# Altium PCB JDY-40.PcbDoc
Units mm, origin at the board's own origin, x right, y up, seen from the top; angles counter-clockwise.
Board outline 13.52 x 14.69 mm, 2 copper layers (TopLayer, BottomLayer); 1 components, 0 nets, 20 pads, 0 vias.
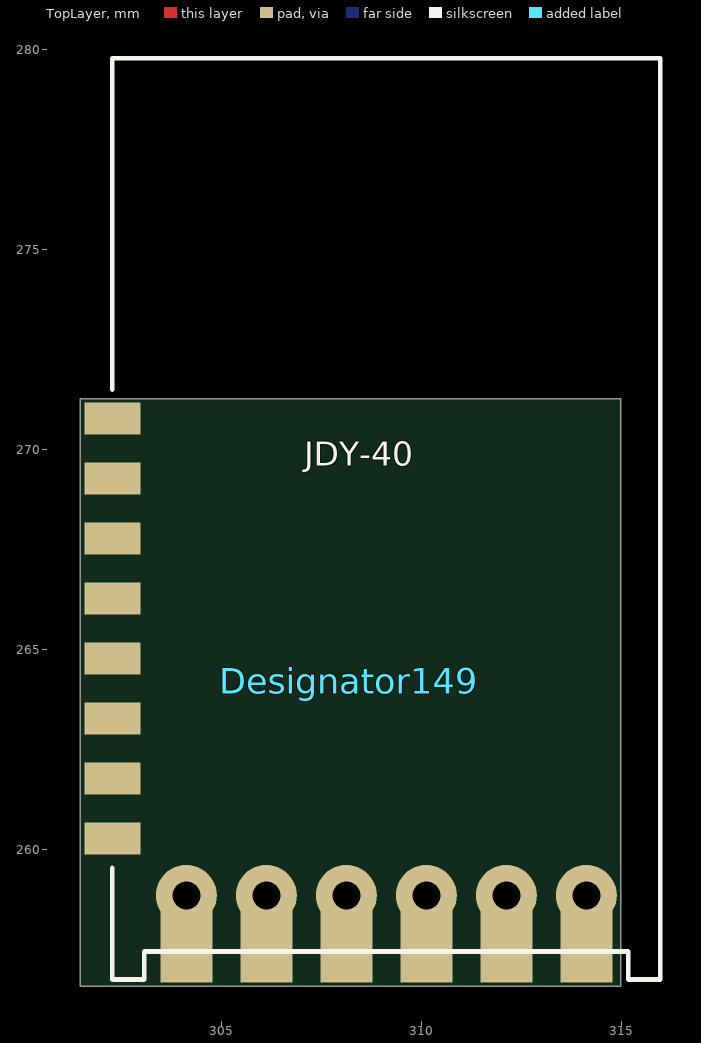
[diagram p0: TopLayer view]
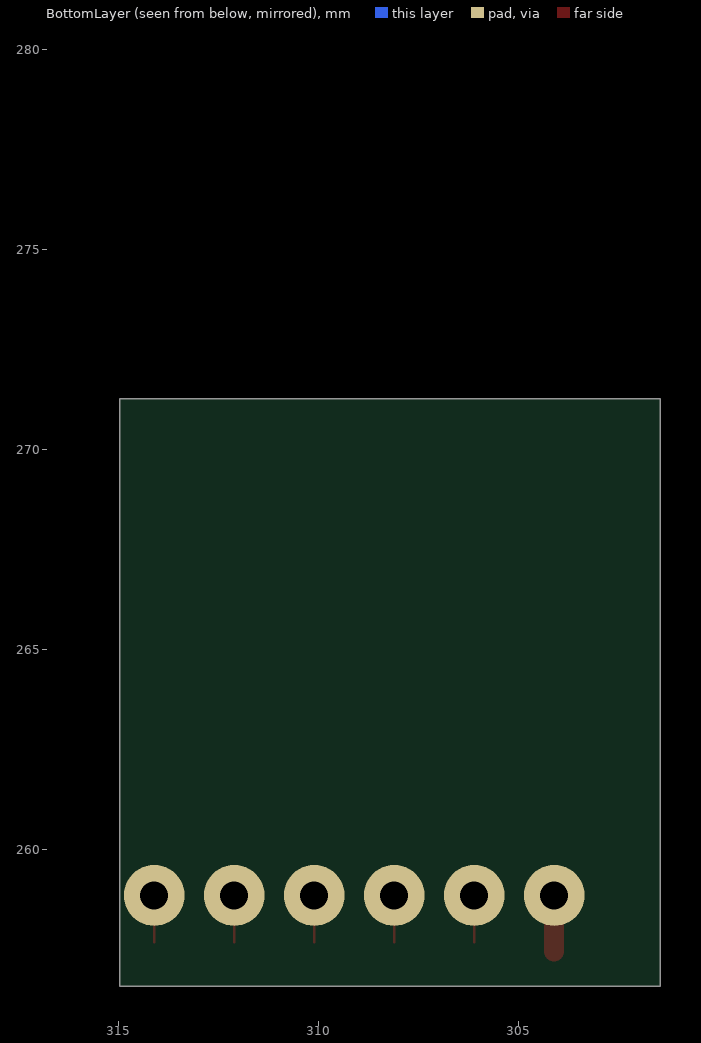
[diagram p1: BottomLayer view, seen from below]

## Layer stack, top to bottom
TopSolder: solder mask 0.0102, Solder Resist, Dk 3.5
TopLayer: signal copper 0.0356
Dielectric1: dielectric 0.32, FR-4, Dk 4.8
BottomLayer: signal copper 0.0356
BottomSolder: solder mask 0.0102, Solder Resist, Dk 3.5

## Board outline
301.458,256.571 314.974,256.571 314.974,271.266 301.458,271.266

## Design rules (kind name [scope] priority, off if disabled: settings)
Clearance [All] p1: gap=0.254 ignorepadtopadclearanceinfootprint=FALSE
FabricationTestPointUsage TestPointUsage [All] p1: valid=0 allowmultiple=FALSE
FabricationTestpoint Testpoint [All] p1: side=3 testpointundercomponent=TRUE minsize=1.016 maxsize=2.54 preferedsize=1.524 minholesize=0.508 maxholesize=1.016 preferedholesize=0.813 testpointgrid=0.025 allowsidetop=TRUE allowsidebottom=TRUE usegrid=TRUE gridtolerance=0
PolygonConnect [All] p1: connectstyle=Relief reliefconductorwidth=0.254 reliefentries=4 polygonreliefangle="90 Angle" airgapwidth=0.254
RoutingVias [All] p1: holewidth=0.711 width=1.27 viastyle="Through Hole" minholewidth=0.711 minwidth=1.27 maxholewidth=0.711 maxwidth=1.27
SolderMaskExpansion [All] p1: expansion=0.102
Width [All] p1: maxlimit=0.254 minlimit=0.254 preferedwidth=0.254
28 further rules are at their usual default settings.

## Components (designator, comment, footprint, x,y, rotation, side; value= is the part's Value field where it differs from the comment)
Designator149 "JDY-40" JDY-401 302.26,270.764 r0 top

## Footprints (in the part's own frame and the unit in brackets; to place one, negate y for a bottom-side part, rotate by r counter-clockwise, add the part's x,y. Pads: shape width x height; smd on the part's side, far side on the other; paste and mask are expansions set on the pad)
JDY-401 [mm]
  rect 1.4x0.8 smd: 1(0,0) 2(0,-1.5) 3(0,-3) 4(0,-4.5) 5(0,-6) 6(0,-7.5) 7(0,-9) 8(0,-10.5)
  rect 1.3x2 smd: 9(1.85,-13.092) 10(3.85,-13.092) 11(5.85,-13.092) 12(7.85,-13.092) 13(9.85,-13.092) 14(11.85,-13.092)
  round 1.524 hole 0.7: 9(1.85,-11.918) 10(3.85,-11.918) 11(5.85,-11.918) 12(7.85,-11.918) 13(9.85,-11.918) 14(11.85,-11.918)
  TopLayer lines w0.051: 1.85,-13.092 1.85,-11.918 ; 3.85,-13.092 3.85,-11.918 ; 5.85,-13.092 5.85,-11.918 ; 7.85,-13.092 7.85,-11.918 ; 9.85,-13.092 9.85,-11.918 ; 11.85,-13.092 11.85,-11.918
  TopLayer lines w0.17: 7.636,-11.704 7.85,-11.918
  TopLayer lines w0.5: 1.85,-13.319 1.85,-11.918 1.85,-11.694
  silkscreen extent 0,-14.02 13.7,9.01

## Nets (pads, with @x,y where several pads share a name; then routed paths per layer and width w, separated by ;. In a path a pad name is that pad's centre, name@x,y a point inside that pad or via, vN(x,y) a via of type N, cw(c..) or ccw(c..) an arc to the next point about the centre after c; other vN are vias at no path point)
pads on no net: Designator149.1 Designator149.2 Designator149.3 Designator149.4 Designator149.5 Designator149.6 Designator149.7 Designator149.8 Designator149.9 Designator149.10 Designator149.11 Designator149.12 Designator149.13 Designator149.14